# EAGLE board Module-PCB (EAGLE 9.0.1)
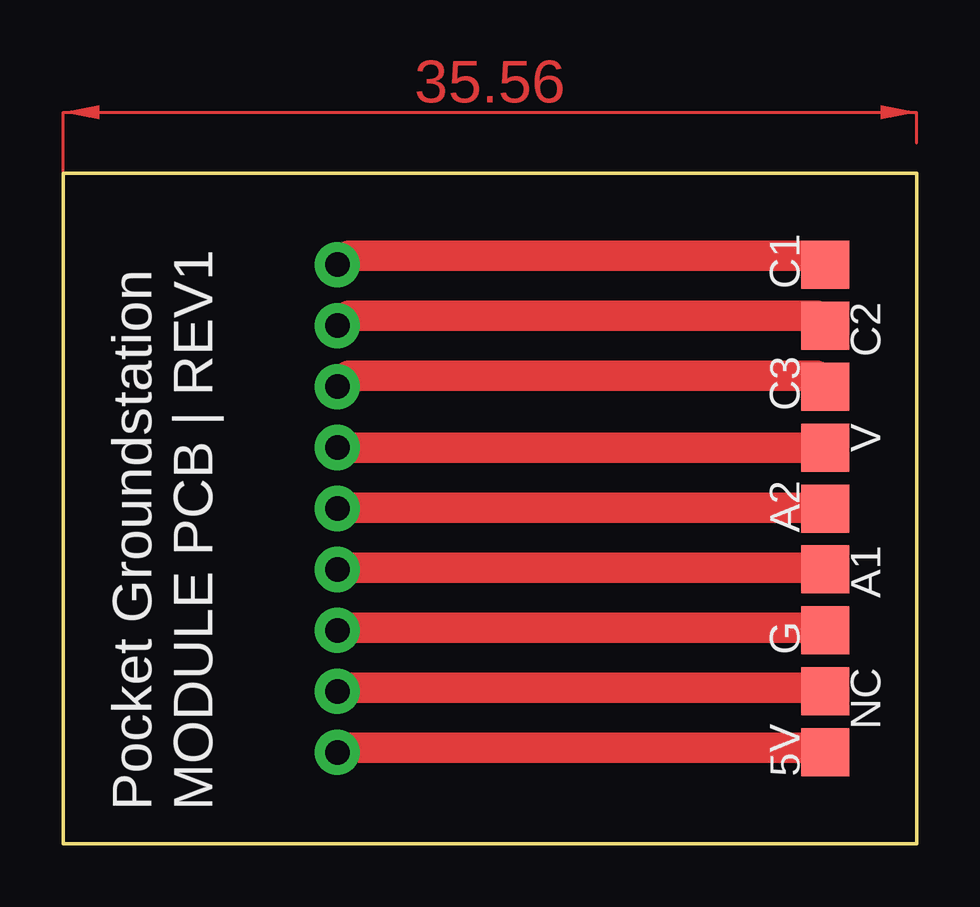
[diagram p0: board, top side]
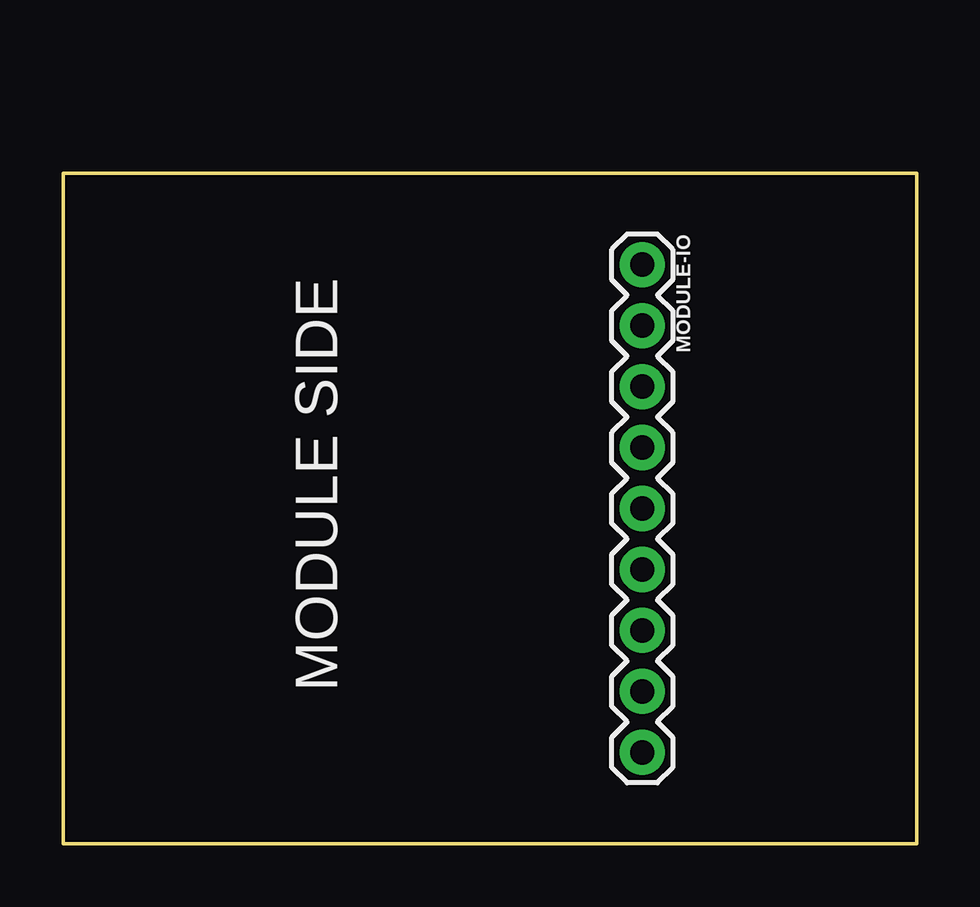
[diagram p1: board, bottom side, seen from below]

Size 35.56 x 27.94 mm. Coordinates in mm from the lower left corner, seen from the top.
Outline: 0,27.94 35.56,27.94 35.56,0 0,0 0,27.94
Copper layers (1*16): Top 0.035mm / dielectric 1.5mm / Bottom 0.035mm
Design rules "default": minimum track width 6mil, minimum drill 0.35mm, track to track 6mil, track to pad 6mil, pad to pad 6mil, via to via 6mil, smd to smd 6mil, copper to edge 40mil, drill to drill 6mil, minimum pad ring 10mil, minimum via ring 8mil, stop-mask expansion 4mil, vias tented up to drill 0mil, thermal gap 10mil
Net classes: 0 default: width 0.5 mm, drill 0.5 mm, clearance 0.5 mm

## Footprints (pad centres in the part's own frame; a part is rotated, then mirrored left to right if it is on the bottom)
TP20SQ = smd 2 x 2: TP 0,0
1X09 = drill 1.016 pad 1.88: 1 0,0; 2 2.54,0; 3 5.08,0; 4 7.62,0; 5 10.16,0; 6 12.7,0; 7 15.24,0; 8 17.78,0; 9 20.32,0

## Placement (x,y rotation side)
5V  TPTP20SQ  [TP20SQ]  31.75,3.81 90 top
A1  TPTP20SQ  [TP20SQ]  31.75,11.43 270 top
A2  TPTP20SQ  [TP20SQ]  31.75,13.97 90 top
C1  TPTP20SQ  [TP20SQ]  31.75,24.13 90 top
C2  TPTP20SQ  [TP20SQ]  31.75,21.59 270 top
C3  TPTP20SQ  [TP20SQ]  31.75,19.05 90 top
G  TPTP20SQ  [TP20SQ]  31.75,8.89 90 top
MODULE-IO  [1X09]  11.43,24.13 270 bottom
NC  TPTP20SQ  [TP20SQ]  31.75,6.35 270 top
V  TPTP20SQ  [TP20SQ]  31.75,16.51 270 top

## Library data of the parts
5V A1 A2 C1-C3 G NC V = testpad
MODULE-IO = SparkFun-Connectors

## Nets
3: C3.TP MODULE-IO.3
N$1: C1.TP MODULE-IO.1
N$2: C2.TP MODULE-IO.2
N$4: MODULE-IO.4 V.TP
N$5: A2.TP MODULE-IO.5
N$6: A1.TP MODULE-IO.6
N$7: G.TP MODULE-IO.7
N$8: MODULE-IO.8 NC.TP
N$9: 5V.TP MODULE-IO.9

## Tracks (layer width: path | path; a pad name or v marks a point on that pad's centre or on a via)
3
  Top 0.5: 31.41,19.5 C3.TP | 11.91,19.5 MODULE-IO.3
  Top 1.27: 11.91,19.5 31.41,19.5
N$1
  Top 0.5: 31.41,24.5 C1.TP | 11.91,24.5 MODULE-IO.1
  Top 1.27: 11.91,24.5 31.41,24.5
N$2
  Top 0.5: 31.41,22 C2.TP | 11.91,22 MODULE-IO.2
  Top 1.27: 11.91,22 31.41,22
N$4
  Top 0.5: 31.41,16.5 V.TP | 11.91,16.5 MODULE-IO.4
  Top 1.27: 11.91,16.5 31.41,16.5
N$5
  Top 0.5: 31.41,14 A2.TP | 11.91,14 MODULE-IO.5
  Top 1.27: 11.91,14 31.41,14
N$6
  Top 0.5: 31.41,11.5 A1.TP | 11.91,11.5 MODULE-IO.6
  Top 1.27: 11.91,11.5 31.41,11.5
N$7
  Top 0.5: 31.41,9 G.TP | 11.91,9 MODULE-IO.7
  Top 1.27: 11.91,9 31.41,9
N$8
  Top 0.5: 31.41,6.5 NC.TP | 11.91,6.5 MODULE-IO.8
  Top 1.27: 11.91,6.5 31.41,6.5
N$9
  Top 0.5: 31.41,4 5V.TP | 11.91,4 MODULE-IO.9
  Top 1.27: 11.91,4 31.41,4
(copper drawn outside any net)
  shapes: Top area x2

## Text on the board
tNames: Pocket Groundstation | MODULE PCB | REV1
bNames: MODULE SIDE